# Altium PCB PCB.PcbDoc (part 1 of 2)
Units mm, origin at the board's own origin, x right, y up, seen from the top; angles counter-clockwise.
Board outline 50 x 50 mm, 2 copper layers (Top Layer, Bottom Layer), stack 1.509 mm thick; 202 components, 107 nets, 579 pads, 22 vias.
Unrouted connection lines stored in the file: 421.
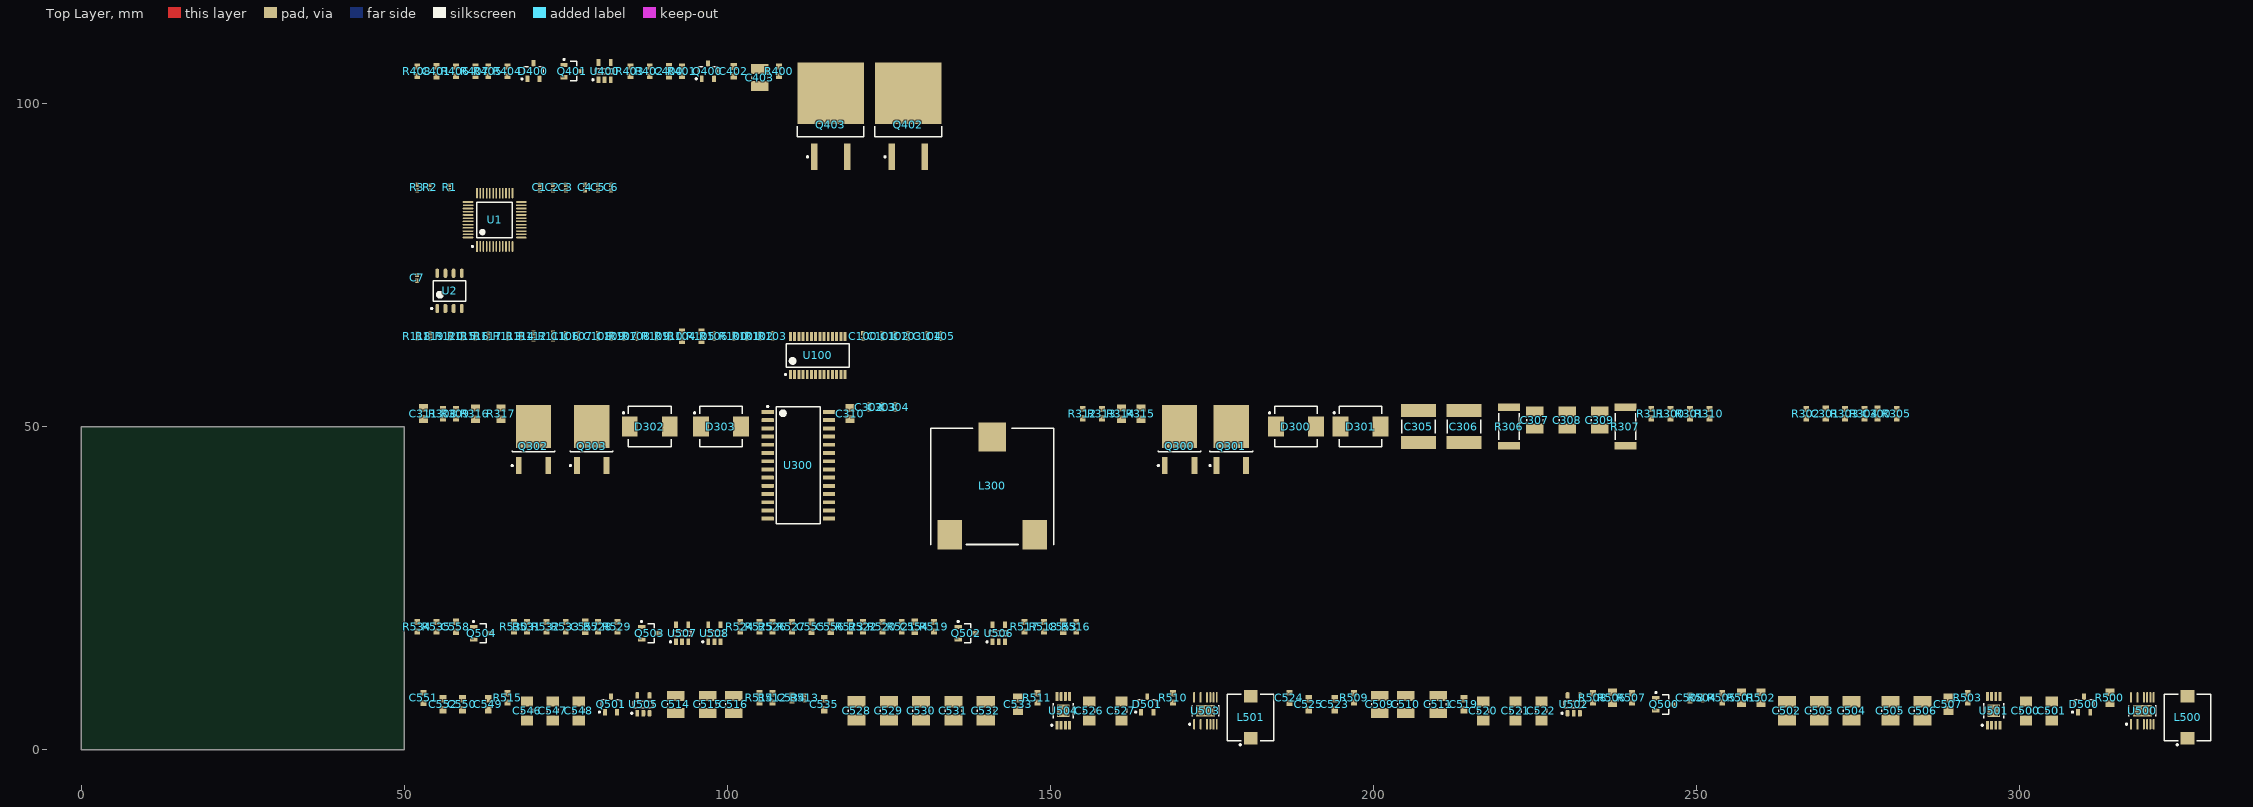
[diagram p0: Top Layer view]
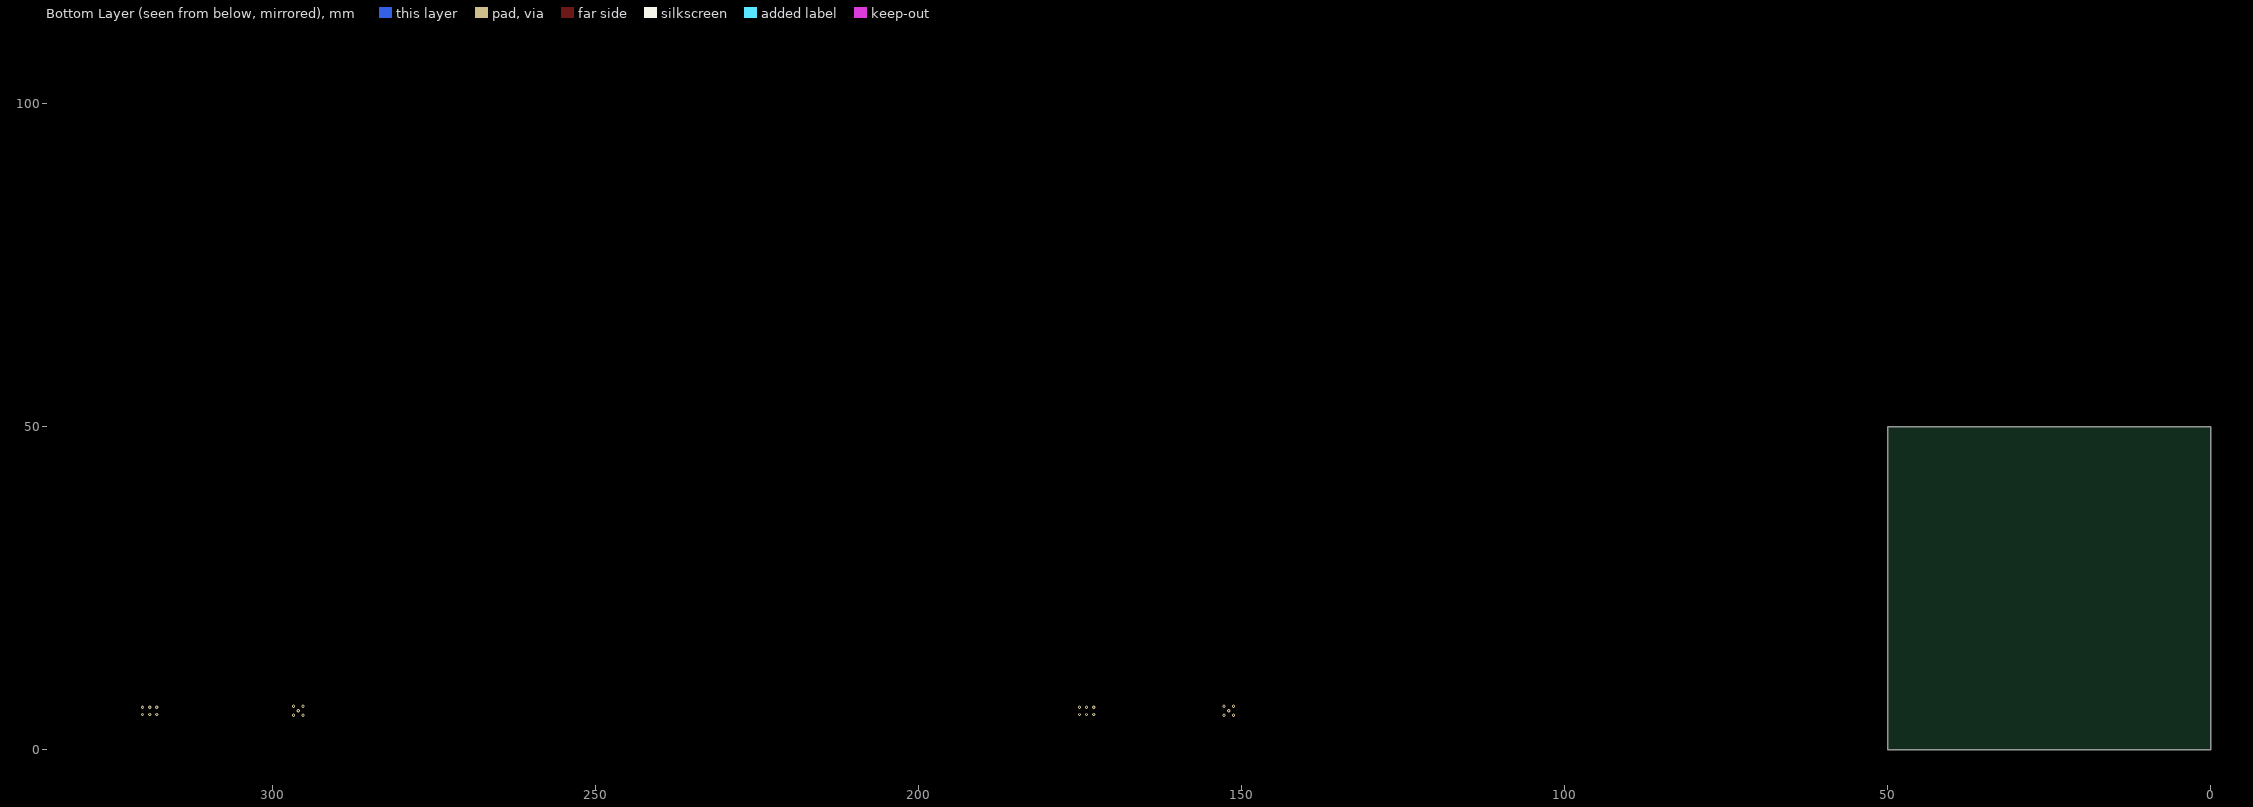
[diagram p1: Bottom Layer view, seen from below]

## Layer stack, top to bottom
Top Solder: solder mask 0.0254, SM-001, Dk 4
Top Layer: signal copper 0.035
Dielectric 1: core 1.4392, Core-043, Dk 4.3
Bottom Layer: signal copper 0.035
Bottom Solder: solder mask 0.0254, SM-001, Dk 4

## Board outline
0,0 0,50 50,50 50,0

## Design rules (kind name [scope] priority, off if disabled: settings)
Clearance [All] p1: gap=0.254 ignorepadtopadclearanceinfootprint=TRUE except(0: Arc-Hole Track-Hole SMDPad-Hole THPad-Hole Via-Hole Fill-Hole Poly-Hole Region-Hole Text-Hole)
DiffPairsRouting [All] p1: maxlimit=0.254 minlimit=0.254 mostfreqgap=0.254 toplayer_minwidth=0.381 toplayer_maxwidth=0.381 toplayer_prefwidth=0.381 bottomlayer_minwidth=0.381 bottomlayer_maxwidth=0.381 bottomlayer_prefwidth=0.381 maxuncoupledlength=12.7
PolygonConnect [All] p1: connectstyle=Relief reliefconductorwidth=0.254 reliefentries=4 polygonreliefangle="90 Angle" airgapwidth=0.254
RoutingTopology [not InNet('GND')] p1: topology=Shortest
RoutingVias [All] p1: holewidth=0.711 width=1.27 viastyle="Through Hole" minholewidth=0.711 minwidth=1.27 maxholewidth=0.711 maxwidth=1.27
SolderMaskExpansion [All] p1: expansion=0.102 istentingtop=FALSE
Width [All] p1: maxlimit=0.254 minlimit=0.254 preferedwidth=0.254
28 further rules are at their usual default settings.

## Classes and differential pairs
component class EEPROM: C7 U2
component class MCU: C1 C2 C3 C4 C5 C6 R1 R2 R3 U1
component class "Panel Mode Switch": C400 C401 C402 C403 D400 Q400 Q401 Q402 Q403 R400 R401 R402 R403 R404 R405 R406 R407 R408 U400
component class "Bridge Regulator": C300 C301 C302 C303 C304 C305 C306 C307 C308 C309 C310 C311 D300 D301 D302 D303 L300 Q300 Q301 Q302 Q303 R300 R301 R302 R303 R304 R305 R306 R307 R308 R309 R310 R311 R312 R313 R314 R315 R316 R317 U300
component class Controller: C100 C101 C102 C103 C104 C105 C106 C107 C108 C109 R100 R101 R102 R103 R104 R105 R106 R107 R108 R109 R110 R111 R112 R113 R114 R115 R116 R117 R118 R119 R120 U100
component class "Bias Regulators 2": C553 C554 C555 C556 C557 C558 Q502 Q503 Q504 R516 R517 R518 R519 R520 R521 R522 R523 R524 R525 R526 R527 R528 R529 R530 R531 R532 R533 R534 R535 U506 U507 U508
component class "Bias Regulators 1": C500 C501 C502 C503 C504 C505 C506 C507 C508 C509 C510 C511 C514 C515 C516 C519 C520 C521 C522 C523 C524 C525 C526 C527 C528 C529 C530 C531 C532 C533 C534 C535 C546 C547 C548 C549 C550 C551 C552 D500 D501 L500 L501 Q500 Q501 R500 R501 R502 R503 R504 R505 R506 R507 R508 R509 R510 R511 R512 R513 R514 R515 U500 U501 U502 U503 U504 U505
differential pair SO: +SO_P -SO_N
differential pair SI: +SI_P -SI_N

## Components (designator, comment, footprint, x,y, rotation, side; value= is the part's Value field where it differs from the comment)
C1 "CL05A475MP5NRNC" "0402_050_5 (Samsumg) B" 71,87 r90 top value=4.7uF
C2 "CL05B104KO5NNNC" "0402_050_5 (Samsumg) B" 73,87 r90 top value=100nF
C3 "CL05B104KO5NNNC" "0402_050_5 (Samsumg) B" 75,87 r90 top value=100nF
C4 "CL05B104KO5NNNC" "0402_050_5 (Samsumg) B" 78,87 r90 top value=100nF
C5 "CL05B104KO5NNNC" "0402_050_5 (Samsumg) B" 80,87 r90 top value=100nF
C6 "CL05A105KA5NQNC" "0402_050_5 (Samsumg) B" 82,87 r90 top value=1uF
C7 "CL05B104KO5NNNC" "0402_050_5 (Samsumg) B" 52,73 r90 top value=100nF
C100 "CL05A105KA5NQNC" "0402_050_5 (Samsumg) B" 121,64 r90 top value=1uF
C101 "CL05A105KA5NQNC" "0402_050_5 (Samsumg) B" 124,64 r90 top value=1uF
C102 "CL05B104KO5NNNC" "0402_050_5 (Samsumg) B" 126,64 r90 top value=100nF
C103 "CL05A105KA5NQNC" "0402_050_5 (Samsumg) B" 128,64 r90 top value=1uF
C104 "CL05A105KA5NQNC" "0402_050_5 (Samsumg) B" 131,64 r90 top value=1uF
C105 "CL05B104KO5NNNC" "0402_050_5 (Samsumg) B" 133,64 r90 top value=100nF
C106 "CL05B104KO5NNNC" "0402_050_5 (Samsumg) B" 75,64 r90 top value=100nF
C107 "CL05B104KO5NNNC" "0402_050_5 (Samsumg) B" 77,64 r90 top value=100nF
C108 "CL05B104KO5NNNC" "0402_050_5 (Samsumg) B" 80,64 r90 top value=100nF
C109 "CL05B104KO5NNNC" "0402_050_5 (Samsumg) B" 82,64 r90 top value=100nF
C300 "0603B103K500NT" 0603_080 278,52 r90 top value=10nF
C301 "0603B103K500NT" 0603_080 270,52 r90 top value=10nF
C302 "CL05B104KO5NNNC" "0402_050_5 (Samsumg) B" 122,53 r90 top value=100nF
C303 "CL05A105KA5NQNC" "0402_050_5 (Samsumg) B" 124,53 r90 top value=1uF
C304 "CL05A105KA5NQNC" "0402_050_5 (Samsumg) B" 126,53 r90 top value=1uF
C305 "FS55X475K101EGG" "2220_F (PSA) B" 207,50 r90 top value=4.7uF
C306 "FS55X475K101EGG" "2220_F (PSA) B" 214,50 r90 top value=4.7uF
C307 "CL32B106KBJNNNE" "1212_250_J (Samsumg) B" 225,51 r90 top value=10uF
C308 "CL32B106KBJNNNE" "1212_250_J (Samsumg) B" 230,51 r90 top value=10uF
C309 "CL32B106KBJNNNE" "1212_250_J (Samsumg) B" 235,51 r90 top value=10uF
C310 "CL21B474KBFNNNE" "0805_125_F (Samsumg) B" 119,52 r90 top value=470nF
C311 "CL21B474KBFNNNE" "0805_125_F (Samsumg) B" 53,52 r90 top value=470nF
C400 "CC0603KRX7R9BB104" 0603#1 91,105 r90 top value=100nF
C401 "CL10C101JB8NNNC" "0603_080_8 (Samsung) B" 55,105 r90 top value=100pF
C402 "CC0603KRX7R9BB104" 0603#1 101,105 r90 top value=100nF
C403 "CL32B105KCJNNNE" "1212_250_J (Samsumg) B" 105,104 r90 top value=1uF
C500 "CL31A106KBHNNNE" "1206_160_H (Samsumg) A" 301,6 r90 top value=10uF
C501 "CL31A106KBHNNNE" "1206_160_H (Samsumg) A" 305,6 r90 top value=10uF
C502 "CL32B105KCJNNNE" "1212_250_J (Samsumg) A" 264,6 r90 top value=1uF
C503 "CL32B105KCJNNNE" "1212_250_J (Samsumg) A" 269,6 r90 top value=1uF
C504 "CL32B105KCJNNNE" "1212_250_J (Samsumg) A" 274,6 r90 top value=1uF
C505 "CL32B105KCJNNNE" "1212_250_J (Samsumg) A" 280,6 r90 top value=1uF
C506 "CL32B105KCJNNNE" "1212_250_J (Samsumg) A" 285,6 r90 top value=1uF
C507 "CL21B103KBANNNC" "0805_065_A (Samsumg) A" 289,7 r90 top value=10nF
C508 "CL05B103KB5NNNC" "0402_050_5 (Samsumg) A" 249,8 r90 top value=10nF
C509 "CL32B225KCJSNNE" "1212_250_J (Samsumg) B" 201,7 r90 top value=2.2uF
C510 "CL32B225KCJSNNE" "1212_250_J (Samsumg) B" 205,7 r90 top value=2.2uF
C511 "CL32B225KCJSNNE" "1212_250_J (Samsumg) B" 210,7 r90 top value=2.2uF
C514 "CL32B225KCJSNNE" "1212_250_J (Samsumg) B" 92,7 r90 top value=2.2uF
C515 "CL32B225KCJSNNE" "1212_250_J (Samsumg) B" 97,7 r90 top value=2.2uF
C516 "CL32B225KCJSNNE" "1212_250_J (Samsumg) B" 101,7 r90 top value=2.2uF
C519 "CL10C100JB8NNNC" "0603_080_8 (Samsung) A" 214,7 r90 top value=10pF
C520 "CL31A106KBHNNNE" "1206_160_H (Samsumg) A" 217,6 r90 top value=10uF
C521 "CL31A106KBHNNNE" "1206_160_H (Samsumg) A" 222,6 r90 top value=10uF
C522 "CL31A106KBHNNNE" "1206_160_H (Samsumg) A" 226,6 r90 top value=10uF
C523 "CL10A225KO8NNNC" "0603_080_8 (Samsung) A" 194,7 r90 top value=2.2uF
C524 "0603B103K500NT" 0603_080 187,8 r90 top value=10nF
C525 "CL10A475KO8NNNC" "0603_080_8 (Samsung) A" 190,7 r90 top value=4.7uF
C526 "CL31A106KBHNNNE" "1206_160_H (Samsumg) A" 156,6 r90 top value=10uF
C527 "CL31A106KBHNNNE" "1206_160_H (Samsumg) A" 161,6 r90 top value=10uF
C528 "CL32B105KCJNNNE" "1212_250_J (Samsumg) A" 120,6 r90 top value=1uF
C529 "CL32B105KCJNNNE" "1212_250_J (Samsumg) A" 125,6 r90 top value=1uF
C530 "CL32B105KCJNNNE" "1212_250_J (Samsumg) A" 130,6 r90 top value=1uF
C531 "CL32B105KCJNNNE" "1212_250_J (Samsumg) A" 135,6 r90 top value=1uF
C532 "CL32B105KCJNNNE" "1212_250_J (Samsumg) A" 140,6 r90 top value=1uF
C533 "CL21B103KBANNNC" "0805_065_A (Samsumg) A" 145,7 r90 top value=10nF
C534 "CL05B103KB5NNNC" "0402_050_5 (Samsumg) A" 110,8 r90 top value=10nF
C535 "CL10C100JB8NNNC" "0603_080_8 (Samsung) A" 115,7 r90 top value=10pF
C546 "CL31A106KBHNNNE" "1206_160_H (Samsumg) A" 69,6 r90 top value=10uF
C547 "CL31A106KBHNNNE" "1206_160_H (Samsumg) A" 73,6 r90 top value=10uF
C548 "CL31A106KBHNNNE" "1206_160_H (Samsumg) A" 77,6 r90 top value=10uF
C549 "CL10A225KO8NNNC" "0603_080_8 (Samsung) A" 63,7 r90 top value=2.2uF
C550 "CL10C101JB8NNNC" "0603_080_8 (Samsung) A" 59,7 r90 top value=100pF
C551 "0603B103K500NT" 0603_080 53,8 r90 top value=10nF
C552 "CL10A475KO8NNNC" "0603_080_8 (Samsung) A" 56,7 r90 top value=4.7uF
C553 "CC0603KRX7R9BB104" 0603#1 152,19 r90 top value=100nF
C554 "CL10B102KB8NNNC" "0603_080_8 (Samsung) B" 129,19 r90 top value=1nF
C555 "CC0603KRX7R9BB104" 0603#1 113,19 r90 top value=100nF
C556 "CC0603KRX7R9BB104" 0603#1 116,19 r90 top value=100nF
C557 "CL10B102KB8NNNC" "0603_080_8 (Samsung) B" 78,19 r90 top value=1nF
C558 "CL10B102KB8NNNC" "0603_080_8 (Samsung) B" 58,19 r90 top value=1nF
D300 "SS510C" "DO-214AB/SMC (MDD) B" 188,50 r0 top
D301 "SS510C" "DO-214AB/SMC (MDD) B" 198,50 r0 top
D302 "SS510C" "DO-214AB/SMC (MDD) B" 88,50 r0 top
D303 "SS510C" "DO-214AB/SMC (MDD) B" 99,50 r0 top
D400 "S-LBAT54CLT1G" "SOT-23-3 (LBAT54C) B" 70,105 r90 top
D500 "S-LBAT54CLT1G" "SOT-23-3 (LBAT54C) B" 310,7 r90 top
D501 "S-LBAT54CLT1G" "SOT-23-3 (LBAT54C) B" 165,7 r90 top
L300 "B82559B0303A019" B82559B0303A019-Footprint-1 141,40 r0 top value=30uH
L500 "SLF7045T-221MR33-PF" "SLF7045 B" 326,5 r90 top value=220uH
L501 "SLF7045T-221MR33-PF" "SLF7045 B" 181,5 r90 top value=220uH
Q300 "DMT8012LK3-13" "TO-252 (DMT8012) B" 170,48 r90 top
Q301 "DMT8012LK3-13" "TO-252 (DMT8012) B" 178,48 r90 top
Q302 "DMT8012LK3-13" "TO-252 (DMT8012) B" 70,48 r90 top
Q303 "DMT8012LK3-13" "TO-252 (DMT8012) B" 79,48 r90 top
Q400 "SS8050" "SOT-23-5 (SS8050) B" 97,105 r90 top
Q401 "BSS123" "SOT-23-3 (2N7002) A" 76,105 r0 top
Q402 "NTB5605PT4G" "D2PAC (NTB5605) B" 128,98 r90 top
Q403 "NTB5605PT4G" "D2PAC (NTB5605) B" 116,98 r90 top
Q500 "2N7002" "SOT-23-3 (2N7002) A" 245,7 r0 top
Q501 "LBSS84LT1G" "SOT-23-3 (LBSS84) B" 82,7 r90 top
Q502 "BSS123" "SOT-23-3 (2N7002) A" 137,18 r0 top
Q503 "2N7002" "SOT-23-3 (2N7002) A" 88,18 r0 top
Q504 "2N7002" "SOT-23-3 (2N7002) A" 62,18 r0 top
R1 "0402WGF2201TCE" "0402 (Uniroyal) C" 57,87 r90 top value=2K2
R2 "0402WGF2201TCE" "0402 (Uniroyal) C" 54,87 r90 top value=2K2
R3 "0402WGF1002TCE" "0402 (Uniroyal) B" 52,87 r90 top value=10K
R100 "Resistor Generic 0402" 0402 101,64 r90 top value=0K0
R101 "0402WGF1202TCE" "0402 (Uniroyal) B" 103,64 r90 top value=12K
R102 "Resistor Generic 0402" 0402 105,64 r90 top value=0K0
R103 "Resistor Generic 0402" 0402 107,64 r90 top value=0K0
R104 "0603WAF6802T5E" 0603#2 93,64 r90 top value=68K
R105 "0603WAF5603T5E" 0603#2 96,64 r90 top value=560K
R106 "0402WGF1002TCE" 0402 98,64 r90 top value=10K
R107 "Resistor Generic 0402" 0402 84,64 r90 top value=0K0
R108 "0402WGF2701TCE" "0402 (Uniroyal) B" 86,64 r90 top value=2K7
R109 "Resistor Generic 0402" 0402 89,64 r90 top value=0K0
R110 "Resistor Generic 0402" 0402 91,64 r90 top value=0K0
R111 "0402WGF3302TCE" "0402 (Uniroyal) A" 73,64 r90 top value=33K
R112 "0402WGF3302TCE" "0402 (Uniroyal) A" 70,64 r90 top value=33K
R113 "0402WGF3901TCE" "0402 (Uniroyal) B" 66,64 r90 top value=3K9
R114 "0402WGF8201TCE" "0402 (Uniroyal) B" 68,64 r90 top value=8K2
R115 "0402WGF1002TCE" "0402 (Uniroyal) B" 59,64 r90 top value=10K
R116 "0402WGF1002TCE" "0402 (Uniroyal) B" 61,64 r90 top value=10K
R117 "0402WGF1002TCE" "0402 (Uniroyal) B" 63,64 r90 top value=10K
R118 "0402WGF1002TCE" "0402 (Uniroyal) B" 52,64 r90 top value=10K
R119 "0402WGF1002TCE" "0402 (Uniroyal) B" 54,64 r90 top value=10K
R120 "0402WGF1002TCE" "0402 (Uniroyal) B" 57,64 r90 top value=10K
R300 "0603WAF8202T5E" "0603 (Uniroyal) B" 246,52 r90 top value=82K
R301 "0603WAF8202T5E" "0603 (Uniroyal) B" 249,52 r90 top value=82K
R302 "0603WAF1001T5E" "0603 (Uniroyal) B" 267,52 r90 top value=1K
R303 "0603WAF1001T5E" "0603 (Uniroyal) B" 273,52 r90 top value=1K
R304 "0603WAF1001T5E" "0603 (Uniroyal) B" 276,52 r90 top value=1K
R305 "0603WAF1001T5E" "0603 (Uniroyal) B" 281,52 r90 top value=1K
R306 "25121WF100MT4E" "2512 (Uniroyal) B" 221,50 r90 top value=10mR
R307 "25121WF100MT4E" "2512 (Uniroyal) B" 239,50 r90 top value=10mR
R308 "0603WAF1002T5E" "0603 (Uniroyal) B" 56,52 r90 top value=10K
R309 "0603WAF1002T5E" "0603 (Uniroyal) B" 58,52 r90 top value=10K
R310 "0603WAF1004T5E" "0603 (Uniroyal) B" 252,52 r90 top value=1M0
R311 "0603WAF1003T5E" "0603 (Uniroyal) B" 243,52 r90 top value=100K
R312 "0603WAF1002T5E" "0603 (Uniroyal) B" 155,52 r90 top value=10K
R313 "0603WAF1002T5E" "0603 (Uniroyal) B" 158,52 r90 top value=10K
R314 "0805W8F0000T5E" "0805 (Uniroyal) B" 161,52 r90 top value=0R0
R315 "0805W8F0000T5E" "0805 (Uniroyal) B" 164,52 r90 top value=0R0
R316 "0805W8F0000T5E" "0805 (Uniroyal) B" 61,52 r90 top value=0R0
R317 "0805W8F0000T5E" "0805 (Uniroyal) B" 65,52 r90 top value=0R0
R400 "0603WAF6803T5E" "0603 (Uniroyal) B" 108,105 r90 top value=680K
R401 "0603WAF3302T5E" "0603 (Uniroyal) B" 93,105 r90 top value=33K
R402 "0603WAF6802T5E" "0603 (Uniroyal) B" 88,105 r90 top value=68K
R403 "0603WAF1005T5E" "0603 (Uniroyal) B" 85,105 r90 top value=10M
R404 "0603WAF5600T5E" "0603 (Uniroyal) B" 66,105 r90 top value=560R
R405 "0603WAF6801T5E" "0603 (Uniroyal) B" 63,105 r90 top value=6K8
R406 "0603WAF6802T5E" "0603 (Uniroyal) B" 58,105 r90 top value=68K
R407 "0603WAF1005T5E" "0603 (Uniroyal) B" 61,105 r90 top value=10M
R408 "0603WAF1004T5E" "0603 (Uniroyal) B" 52,105 r90 top value=1M0
R500 "0805W8F1004T5E" "0805 (Uniroyal) B" 314,8 r90 top value=1M0
R501 "0805W8F3903T5E" "0805 (Uniroyal) B" 257,8 r90 top value=390K
R502 "0805W8F6803T5E" "0805 (Uniroyal) B" 260,8 r90 top value=680K
R503 "0603WAF1204T5E" "0603 (Uniroyal) B" 292,8 r90 top value=1M2
R504 "0402WGF1003TCE" "0402 (Uniroyal) B" 251,8 r90 top value=100K
R505 "0603WAF3302T5E" "0603 (Uniroyal) B" 254,8 r90 top value=33K
R506 "0805W8F1502T5E" "0805 (Uniroyal) B" 237,8 r90 top value=15K
R507 "0603WAF1503T5E" "0603 (Uniroyal) B" 240,8 r90 top value=150K
R508 "0603WAF3903T5E" 0603#2 234,8 r90 top value=390K
R509 "0603WAF1003T5E" "0603 (Uniroyal) B" 197,8 r90 top value=100K
R510 "0603WAF6803T5E" "0603 (Uniroyal) B" 169,8 r90 top value=680K
R511 "0603WAF3903T5E" "0603 (Uniroyal) B" 148,8 r90 top value=390K
R512 "0603WAF1002T5E" "0603 (Uniroyal) B" 107,8 r90 top value=10K
R513 "0402WGF1003TCE" "0402 (Uniroyal) B" 112,8 r90 top value=100K
R514 "0603WAF1203T5E" "0603 (Uniroyal) B" 105,8 r90 top value=120K
R515 "0603WAF1003T5E" "0603 (Uniroyal) B" 66,8 r90 top value=100K
R516 "0603WAF1005T5E" "0603 (Uniroyal) B" 154,19 r90 top value=10M
R517 "0603WAF1005T5E" "0603 (Uniroyal) B" 146,19 r90 top value=10M
R518 "0603WAF6804T5E" "0603 (Uniroyal) B" 149,19 r90 top value=6M8
R519 "0603WAF4700T5E" "0603 (Uniroyal) B" 132,19 r90 top value=470R
R520 "0603WAF1005T5E" "0603 (Uniroyal) B" 124,19 r90 top value=10M
R521 "0603WAF2704T5E" "0603 (Uniroyal) B" 127,19 r90 top value=2M7
R522 "HMC0603JT33M0" "0603 (Stackpole HMC) B" 121,19 r90 top value=33M
R523 "0603WAF1004T5E" "0603 (Uniroyal) B" 119,19 r90 top value=1M0
R524 "0603WAF1005T5E" "0603 (Uniroyal) B" 102,19 r90 top value=10M
R525 "0603WAF2204T5E" "0603 (Uniroyal) B" 105,19 r90 top value=2M2
R526 "0603WAF1005T5E" "0603 (Uniroyal) B" 107,19 r90 top value=10M
R527 "0603WAF3303T5E" "0603 (Uniroyal) B" 110,19 r90 top value=330K
R528 "0603WAF4700T5E" "0603 (Uniroyal) B" 80,19 r90 top value=470R
R529 "0603WAF1004T5E" "0603 (Uniroyal) B" 83,19 r90 top value=1M0
R530 "0603WAF1005T5E" "0603 (Uniroyal) B" 67,19 r90 top value=10M
R531 "0603WAF2704T5E" "0603 (Uniroyal) B" 69,19 r90 top value=2M7
R532 "0603WAF1005T5E" "0603 (Uniroyal) B" 72,19 r90 top value=10M
R533 "0603WAF3303T5E" "0603 (Uniroyal) B" 75,19 r90 top value=330K
R534 "0603WAF1005T5E" "0603 (Uniroyal) B" 52,19 r90 top value=10M
R535 "0603WAF6804T5E" "0603 (Uniroyal) B" 55,19 r90 top value=6M8
U1 "STM32L072CBT6" FP-LQFP48-5B-IPC_B 64,82 r90 top
U2 "M24C64-RMN6TP" "SO8N (M24) B" 57,71 r90 top
U100 "SM72445MT/NOPB" PW0028A_N 114,61 r90 top
U300 "SM72295MAX/NOPB" DW0028A_N 111,44 r0 top
U400 "MCP6541T-I/OT" "SOT-23-5 (MCP75x) B" 81,105 r90 top
U500 "LTC3639HMSE#PBF" LT-MSE-16-V(12)4PR-EDP_N 319,6 r90 top
U501 "TPS7A4001" DGN0008B_N 296,6 r90 top
U502 "LP2985A-50DBVR" "SOT-23-5 (DBV0005A) B" 231,7 r90 top
U503 "LTC3639HMSE#PBF" LT-MSE-16-V(12)4PR-EDP_N 174,6 r90 top
U504 "TPS7A4001" DGN0008B_N 152,6 r90 top
U505 "LP2985A-33DBVR" "SOT-23-5 (DBV0005A) B" 87,7 r90 top
U506 "MCP6541T-I/OT" "SOT-23-5 (MCP75x) B" 142,18 r90 top
U507 "MCP6541T-I/OT" "SOT-23-5 (MCP75x) B" 93,18 r90 top
U508 "MCP6541T-I/OT" "SOT-23-5 (MCP75x) B" 98,18 r90 top

## Footprints (in the part's own frame and the unit in brackets; to place one, negate y for a bottom-side part, rotate by r counter-clockwise, add the part's x,y. Pads: shape width x height; smd on the part's side, far side on the other; paste and mask are expansions set on the pad)
0402 [mm] "Chip Resistor, 2-Leads, Body 1,00x0,50mm, IPC Medium Density"
  rect 0.55x0.55 smd: 1(-0.475,0) 2(0.475,0)
  body extent -0.55,-0.28 0.55,0.28, height 0.4
"0402 (Uniroyal) A" [mm] "Chip Resistor, 2-Leads, Body 1.00x0.50mm, IPC Low Density"
  rect 0.75x0.65 smd: 1(-0.475,0) 2(0.475,0)
  body extent -0.55,-0.28 0.55,0.28, height 0.4
"0402 (Uniroyal) B" [mm] "Chip Resistor, 2-Leads, Body 1.00x0.50mm, IPC Medium Density"
  rect 0.65x0.55 smd: 1(-0.425,0) 2(0.425,0)
  body extent -0.55,-0.28 0.55,0.28, height 0.4
"0402 (Uniroyal) C" [mm] "Chip Resistor, 2-Leads, Body 1.00x0.50mm, IPC High Density"
  rect 0.55x0.45 smd: 1(-0.375,0) 2(0.375,0)
  body extent -0.55,-0.28 0.55,0.28, height 0.4
"0402_050_5 (Samsumg) A" [mm] "Chip Capacitor, 2-Leads, Body 1.00x0.50mm, IPC Low Density"
  rect 0.76x0.72 smd: 1(-0.49,0) 2(0.49,0)
  body extent -0.53,-0.28 0.53,0.28, height 0.55
"0402_050_5 (Samsumg) B" [mm] "Chip Capacitor, 2-Leads, Body 1.00x0.50mm, IPC Medium Density"
  rect 0.66x0.62 smd: 1(-0.44,0) 2(0.44,0)
  body extent -0.53,-0.28 0.53,0.28, height 0.55
0603#1 [mm] "Chip Capacitor, 2-Leads, Body 1,60x0,80mm, IPC Medium Density"
  rect 1.05x0.95 smd: 1(-0.725,0) 2(0.725,0)
  body extent -0.85,-0.45 0.85,0.45, height 0.9
0603#2 [mm] "Chip Resistor, 2-Leads, Body 1,60x0,80mm, IPC Medium Density"
  rect 0.95x0.9 smd: 1(-0.725,0) 2(0.725,0)
  body extent -0.85,-0.45 0.85,0.45, height 0.55
"0603 (Stackpole HMC) B" [mm] "Chip Resistor, 2-Leads, Body 1.60x0.80mm, IPC Medium Density"
  rect 0.95x0.9 smd: 1(-0.725,0) 2(0.725,0)
  body extent -0.85,-0.45 0.85,0.45, height 0.55
"0603 (Uniroyal) B" [mm] "Chip Resistor, 2-Leads, Body 1.60x0.80mm, IPC Medium Density"
  rect 0.95x0.9 smd: 1(-0.725,0) 2(0.725,0)
  body extent -0.85,-0.45 0.85,0.45, height 0.55
0603_080 [mm] "Chip Capacitor, 2-Leads, Body 1,60x0,80mm, IPC Medium Density"
  rect 0.9x0.95 smd: 1(-0.8,0) 2(0.8,0)
  body extent -0.85,-0.45 0.85,0.45, height 0.9
"0603_080_8 (Samsung) A" [mm] "Chip Capacitor, 2-Leads, Body 1.60x0.80mm, IPC Low Density"
  rect 1.2x1.05 smd: 1(-0.85,0) 2(0.85,0)
  body extent -0.85,-0.45 0.85,0.45, height 0.9
"0603_080_8 (Samsung) B" [mm] "Chip Capacitor, 2-Leads, Body 1.60x0.80mm, IPC Medium Density"
  rect 1x0.95 smd: 1(-0.75,0) 2(0.75,0)
  body extent -0.85,-0.45 0.85,0.45, height 0.9
"0805 (Uniroyal) B" [mm] "Chip Resistor, 2-Leads, Body 2.00x1.27mm, IPC Medium Density"
  rect 1.1x1.4 smd: 1(-0.875,0) 2(0.875,0)
  body extent -1.07,-0.7 1.07,0.7, height 0.65
"0805_065_A (Samsumg) A" [mm] "Chip Capacitor, 2-Leads, Body 2.00x1.25mm, IPC Low Density"
  rect 1.4x1.5 smd: 1(-0.95,0) 2(0.95,0)
  body extent -1.05,-0.67 1.05,0.67, height 0.75
"0805_125_F (Samsumg) B" [mm] "Chip Capacitor, 2-Leads, Body 2.00x1.25mm, IPC Medium Density"
  rect 1.2x1.4 smd: 1(-0.85,0) 2(0.85,0)
  body extent -1.05,-0.67 1.05,0.67, height 1.35
"1206_160_H (Samsumg) A" [mm] "Chip Capacitor, 2-Leads, Body 3.20x1.60mm, IPC Low Density"
  rect 1.55x1.9 smd: 1(-1.475,0) 2(1.475,0)
  silkscreen extent -0.3,-0.85 0.3,0.85, body extent -1.7,-0.9 1.7,0.9, height 1.8
"1212_250_J (Samsumg) A" [mm] "Chip Capacitor, 2-Leads, Body 3.20x2.50mm, IPC Low Density"
  rect 1.75x2.8 smd: 1(-1.425,0) 2(1.425,0)
  silkscreen extent -0.15,-1.3 0.15,1.3, body extent -1.75,-1.35 1.75,1.35, height 2.7
"1212_250_J (Samsumg) B" [mm] "Chip Capacitor, 2-Leads, Body 3.20x2.50mm, IPC Medium Density"
  rect 1.55x2.7 smd: 1(-1.325,0) 2(1.325,0)
  silkscreen extent -0.15,-1.25 0.15,1.25, body extent -1.75,-1.35 1.75,1.35, height 2.7
"2220_F (PSA) B" [mm] "Chip Capacitor, 2-Leads, Body 5.75x5.00mm, IPC Medium Density"
  rect 2x5.4 smd: 1(-2.45,0) 2(2.45,0)
  silkscreen extent -1.05,-2.6 1.05,2.6, body extent -3.1,-2.7 3.1,2.7, height 2.2
"2512 (Uniroyal) B" [mm] "Chip Resistor, 2-Leads, Body 6.35x3.20mm, IPC Medium Density"
  rect 1.15x3.4 smd: 1(-3,0) 2(3,0)
  silkscreen extent -2.05,-1.6 2.05,1.6, body extent -3.22,-1.7 3.22,1.7, height 0.65
B82559B0303A019-Footprint-1 [mm]
  rect 3.85x4.5 smd: 1(-6.575,-6.75) 2(6.575,-6.75)
  rect 4.3x4.5 smd: 3(0,8.35)
  silkscreen extent -9.5,-8.25 9.5,9.75, body extent -9.3,-8.2 9.8,9.8, height 10.2
"D2PAC (NTB5605) B" [mm] "D2-PAK, 3-Pads, Body 7.93x8.50mm (max), IPC Medium Density"
  rect 4.15x1 smd: 1(-6.25,2.54) 3(-6.25,-2.54)
  rect 9.5x10.35 smd: 4(3.6,0)
  silkscreen extent -6.37,-5.15 -1.55,5.15, body extent -7.17,-5.15 8.07,5.15, height 4.83
DGN0008B_N [mm] "TSOP, 8-Leads, Body 3.1x3.1mm, Pitch 0.65mm, Thermal Pad 1.98x1.88mm, IPC Medium Density"
  rrect22% 1.35x0.45 smd: 1(-2.225,0.975) 2(-2.225,0.325) 3(-2.225,-0.325) 4(-2.225,-0.975) 5(2.225,-0.975) 6(2.225,-0.325) 7(2.225,0.325) 8(2.225,0.975)
  rrect5% 1.88x1.98 smd: 9(0,0)
  silkscreen extent -2.35,-1.55 1.15,1.9, body extent -2.45,-1.5 2.45,1.5, height 0.94
"DO-214AB/SMC (MDD) B" [mm] "Molded Diode, 2-Leads, Body 6.86x5.91mm, IPC Medium Density"
  rect 2.45x3.15 smd: 1(-3.1,0) 2(3.1,0)
  silkscreen extent -4.2,-3.15 3.3,3.15, body extent -3.52,-3.11 3.52,3.11, height 2.62
DW0028A_N [mm] "SOIC, 28-Leads, Body 18.1x7.6mm, Pitch 1.27mm, IPC Medium Density"
  rrect17% 1.9x0.6 smd: 1(-4.75,8.255) 2(-4.75,6.985) 3(-4.75,5.715) 4(-4.75,4.445) 5(-4.75,3.175) 6(-4.75,1.905) 7(-4.75,0.635) 8(-4.75,-0.635) 9(-4.75,-1.905) 10(-4.75,-3.175) 11(-4.75,-4.445) 12(-4.75,-5.715) 13(-4.75,-6.985) 14(-4.75,-8.255) 15(4.75,-8.255) 16(4.75,-6.985) 17(4.75,-5.715) 18(4.75,-4.445) 19(4.75,-3.175) 20(4.75,-1.905) 21(4.75,-0.635) 22(4.75,0.635) 23(4.75,1.905) 24(4.75,3.175) 25(4.75,4.445) 26(4.75,5.715) 27(4.75,6.985) 28(4.75,8.255)
  silkscreen extent -4.87,-9.05 3.4,9.23, body extent -5.16,-8.95 5.16,8.95, height 2.55
FP-LQFP48-5B-IPC_B [mm]
  rect 1.655x0.252 smd paste+0 mask+0: 1(-4.125,2.75)
  rrect100% 1.655x0.252 smd paste+0 mask+0: 2(-4.125,2.25) 3(-4.125,1.75) 4(-4.125,1.25) 5(-4.125,0.75) 6(-4.125,0.25) 7(-4.125,-0.25) 8(-4.125,-0.75) 9(-4.125,-1.25) 10(-4.125,-1.75) 11(-4.125,-2.25) 12(-4.125,-2.75) 25(4.125,-2.75) 26(4.125,-2.25) 27(4.125,-1.75) 28(4.125,-1.25) 29(4.125,-0.75) 30(4.125,-0.25) 31(4.125,0.25) 32(4.125,0.75) 33(4.125,1.25) 34(4.125,1.75) 35(4.125,2.25) 36(4.125,2.75)
  rrect100% 0.252x1.655 smd paste+0 mask+0: 13(-2.75,-4.125) 14(-2.25,-4.125) 15(-1.75,-4.125) 16(-1.25,-4.125) 17(-0.75,-4.125) 18(-0.25,-4.125) 19(0.25,-4.125) 20(0.75,-4.125) 21(1.25,-4.125) 22(1.75,-4.125) 23(2.25,-4.125) 24(2.75,-4.125) 37(2.75,4.125) 38(2.25,4.125) 39(1.75,4.125) 40(1.25,4.125) 41(0.75,4.125) 42(0.25,4.125) 43(-0.25,4.125) 44(-0.75,4.125) 45(-1.25,4.125) 46(-1.75,4.125) 47(-2.25,4.125) 48(-2.75,4.125)
  silkscreen extent -4.25,-2.75 2.75,3.58, body extent -5.2,-5.2 5.2,5.2, height 0.25
LT-MSE-16-V(12)4PR-EDP_N [mm] "SOP, 12-Leads, Body 4.1x3.1mm, Pitch 0.5mm, Thermal Pad 1.76x2.95mm, IPC Medium Density"
  oval 1.65x0.3 smd: 1(-2.075,1.75) 3(-2.075,0.75) 5(-2.075,-0.25) 6(-2.075,-0.75) 7(-2.075,-1.25) 8(-2.075,-1.75) 9(2.075,-1.75) 10(2.075,-1.25) 11(2.075,-0.75) 12(2.075,-0.25) 14(2.075,0.75) 16(2.075,1.75)
  rect 1.76x2.95 smd: 17(0,0)
  silkscreen extent -2.2,-2.08 0.85,2.57, body extent -2.45,-2.05 2.45,2.05, height 1.1
PW0028A_N [mm] "SOP, 28-Leads, Body 9.8x4.5mm, Pitch 0.65mm, IPC Medium Density"
  rrect22% 1.4x0.45 smd: 1(-2.95,4.225) 2(-2.95,3.575) 3(-2.95,2.925) 4(-2.95,2.275) 5(-2.95,1.625) 6(-2.95,0.975) 7(-2.95,0.325) 8(-2.95,-0.325) 9(-2.95,-0.975) 10(-2.95,-1.625) 11(-2.95,-2.275) 12(-2.95,-2.925) 13(-2.95,-3.575) 14(-2.95,-4.225) 15(2.95,-4.225) 16(2.95,-3.575) 17(2.95,-2.925) 18(2.95,-2.275) 19(2.95,-1.625) 20(2.95,-0.975) 21(2.95,-0.325) 22(2.95,0.325) 23(2.95,0.975) 24(2.95,1.625) 25(2.95,2.275) 26(2.95,2.925) 27(2.95,3.575) 28(2.95,4.225)
  silkscreen extent -3.07,-4.9 1.85,5.12, body extent -3.21,-4.85 3.21,4.85, height 1
"SLF7045 B" [mm] "Precision Wire Wound Inductor, 2-Leads, Body 7.00x7.00mm, IPC Medium Density"
  rect 1.9x2.1 smd: 1(-3.25,0) 2(3.25,0)
  silkscreen extent -4.37,-3.6 3.6,3.6, body extent -3.6,-3.5 3.6,3.5, height 4.9
"SO8N (M24) B" [mm] "SOIC, 8-Leads, Body 4.90x3.90mm, Pitch 1.27mm, IPC Medium Density"
  oval 1.45x0.6 smd: 1(-2.725,1.905) 2(-2.725,0.635) 3(-2.725,-0.635) 4(-2.725,-1.905) 5(2.725,-1.905) 6(2.725,-0.635) 7(2.725,0.635) 8(2.725,1.905)
  silkscreen extent -2.85,-2.5 1.6,2.88, body extent -3,-2.5 3,2.5, height 1.75
"SOT-23-3 (2N7002) A" [mm] "SOT23, 3-Leads, Body 2.90x2.40mm, Pitch 0.95mm, IPC Low Density"
  rect 1.15x0.65 smd: 1(-1.275,0.95) 2(-1.275,-0.95) 3(1.275,0)
  silkscreen extent -1.4,-1.5 0.7,1.95, body extent -1.28,-1.5 1.28,1.5, height 1.15
"SOT-23-3 (LBAT54C) B" [mm] "SOT23, 3-Leads, Body 2.92x2.37mm, Pitch 0.95mm, IPC Medium Density"
  rect 1x0.6 smd: 1(-1.2,0.95) 2(-1.2,-0.95) 3(1.2,0)
  silkscreen extent -1.32,-1.5 0.7,1.92, body extent -1.42,-1.52 1.42,1.52, height 1.11
"SOT-23-3 (LBSS84) B" [mm] "SOT23, 3-Leads, Body 2.92x2.37mm, Pitch 0.95mm, IPC Medium Density"
  rect 1x0.6 smd: 1(-1.2,0.95) 2(-1.2,-0.95) 3(1.2,0)
  silkscreen extent -1.32,-1.5 0.7,1.92, body extent -1.32,-1.52 1.32,1.52, height 1.11
"SOT-23-5 (DBV0005A) B" [mm] "SOT23, 5-Leads, Body 2.90x2.80mm, Pitch 0.95mm, IPC Medium Density"
  rrect50% 1x0.6 smd: 1(-1.375,0.95) 2(-1.375,0) 3(-1.375,-0.95) 4(1.375,-0.95) 5(1.375,0.95)
  silkscreen extent -1.5,-1.55 0.5,1.92, body extent -1.5,-1.53 1.5,1.53, height 1.45
"SOT-23-5 (MCP75x) B" [mm] "SOT23, 5-Leads, Body 2.90x2.80mm, Pitch 0.95mm, IPC Medium Density"
  rect 1.05x0.6 smd: 1(-1.325,0.95) 2(-1.325,0) 3(-1.325,-0.95) 4(1.325,-0.95) 5(1.325,0.95)
  silkscreen extent -1.45,-1.45 0.4,1.92, body extent -1.4,-1.45 1.4,1.45, height 1.45
"SOT-23-5 (SS8050) B" [mm] "SOT23, 3-Leads, Body 2.90x2.40mm, Pitch 0.95mm, IPC Medium Density"
  rect 0.95x0.6 smd: 1(-1.175,0.95) 2(-1.175,-0.95) 3(1.175,0)
  silkscreen extent -1.3,-1.5 0.7,1.92, body extent -1.28,-1.5 1.28,1.5, height 1.15
"TO-252 (DMT8012) B" [mm]
  rect 2.6x0.9 smd: 1(-4.05,2.29) 3(-4.05,-2.29)
  rect 6.7x5.45 smd: 4(2,0)
  silkscreen extent -4.17,-3.3 -1.75,3.41, body extent -4.24,-3.3 5.42,3.3, height 2.39

## Part data
C1: library part CMP-045-000019-8, "MLCC 4.7uF 0402 10V X5R ±20%", Dielectric=X5R, LCSC Part Number=C23733, Manufacturer=Samsung, Package=0402, Tolerance=±20%, Voltage=10V, ComponentLink1Description=Datasheet, ComponentLink1URL=https://datasheet.lcsc.com/szlcsc/Samsung-Electro-Mechanics-CL05C100JB5NNNC_C32949.pdf, Populate=CRITICAL
C2 C3 C4 C5 C7 C102 C105 C106 C107 C108 C109 C302: library part CMP-045-000014-12, "MLCC 100nF 0402 16V X7R ±10%", Dielectric=X7R, LCSC Part Number=C1525, Manufacturer=Samsung, Package=0402, Tolerance=±10%, Voltage=16V, ComponentLink1Description=Datasheet, ComponentLink1URL=https://datasheet.lcsc.com/szlcsc/Samsung-Electro-Mechanics-CL05C100JB5NNNC_C32949.pdf, Populate=CRITICAL
C6 C100 C101 C103 C104 C303 C304: library part CMP-045-000001-7, "MLCC 1uF 0402 25V X5R ±10%", Dielectric=X5R, LCSC Part Number=C52923, Manufacturer=Samsung, Package=0402, Tolerance=±10%, Voltage=25V, ComponentLink1Description=Datasheet, ComponentLink1URL=https://datasheet.lcsc.com/szlcsc/Samsung-Electro-Mechanics-CL05C100JB5NNNC_C32949.pdf, Populate=CRITICAL
C300 C301: library part CMP-014-000000-8, "MLCC 10nF 0603 50V X7R ±10%", Dielectric=X7R, LCSC Part Number=C57112, Manufacturer=Guandong, Package=0603, Tolerance=±15%, Voltage=50V, ComponentLink1Description=Datasheet, ComponentLink1URL=https://datasheet.lcsc.com/szlcsc/Guangdong-Fenghua-Advanced-Tech-0402B102K500NT_C1523.pdf, Populate=CRITICAL
C305 C306: library part CMP-014-000011-1, "MLCC 4.7uF 2220 100V X7R ±10%", Dielectric=X7R, LCSC Part Number=C153031, Manufacturer="Prosperity Dielectrics", Package=2210, Tolerance=±10%, Voltage=100V, ComponentLink1Description=Datasheet, ComponentLink1URL=https://datasheet.lcsc.com/lcsc/1811111621_PSA-Prosperity-Dielectrics-FS55X475K101EGG_C153031.pdf, Populate=CRITICAL
C307 C308 C309: library part CMP-014-000012-1, "MLCC 10uF 1210 50V X7R ±10%", Dielectric=X7R, LCSC Part Number=C138687, Manufacturer=Samsung, Package=1210, Tolerance=±10%, Voltage=50V, ComponentLink1Description=Datasheet, ComponentLink1URL=https://datasheet.lcsc.com/szlcsc/Samsung-Electro-Mechanics-CL05C100JB5NNNC_C32949.pdf, Populate=CRITICAL
C310 C311: library part CMP-014-000014-1, "MLCC 470nF 0805 50V X7R ±10%", Dielectric=X7R, LCSC Part Number=C13967, Manufacturer=Samsung, Package=0805, Tolerance=±10%, Voltage=50V, ComponentLink1Description=Datasheet, ComponentLink1URL=https://datasheet.lcsc.com/szlcsc/Samsung-Electro-Mechanics-CL05C100JB5NNNC_C32949.pdf, Populate=CRITICAL
C400 C402 C553 C555 C556: library part CMP-047-000000-6, "MLCC 100nF 50V 0603 X7R ±10%", Dielectric=X7R, LCSC Part Number=C14663, Manufacturer=Yageo, Package=0603, Tolerance=±10%, Voltage=50V, ComponentLink1Description=Datasheet, ComponentLink1URL=https://datasheet.lcsc.com/szlcsc/YAGEO-CC0603KRX7R9BB104_C14663.pdf, Populate=CRITICAL
C401 C550: library part CMP-045-000015-8, "MLCC 100pF 0603 50V C0G ±0.1pF", Dielectric=C0G, LCSC Part Number=C14858, Manufacturer=Samsung, Package=0603, Tolerance=±0.1pF, Voltage=50V, ComponentLink1Description=Datasheet, ComponentLink1URL=https://datasheet.lcsc.com/szlcsc/Samsung-Electro-Mechanics-CL05C100JB5NNNC_C32949.pdf, Populate=CRITICAL
C403 C502 C503 C504 C505 C506 C528 C529 C530 C531 C532: library part CMP-014-000009-3, "MLCC 1uF 1210 100V X7R ±10%", Dielectric=X7R, LCSC Part Number=C444847, Manufacturer=Samsung, Package=1210, Tolerance=±10%, Voltage=100V, ComponentLink1Description=Datasheet, ComponentLink1URL=https://datasheet.lcsc.com/szlcsc/Samsung-Electro-Mechanics-CL05C100JB5NNNC_C32949.pdf, Populate=CRITICAL
C500 C501 C520 C521 C522 C526 C527 C546 C547 C548: library part CMP-045-000010-7, "MLCC 10uF 1206 50V X5R ±10%", Dielectric=X5R, LCSC Part Number=C13585, Manufacturer=Samsung, Package=1206, Tolerance=±10%, Voltage=50V, ComponentLink1Description=Datasheet, ComponentLink1URL=https://datasheet.lcsc.com/szlcsc/Samsung-Electro-Mechanics-CL05C100JB5NNNC_C32949.pdf, Populate=CRITICAL
C507 C533: library part CMP-045-000006-9, "MLCC 10nF 0805 50V X7R ±10%", Dielectric=X7R, LCSC Part Number=C1710, Manufacturer=Samsung, Package=0805, Tolerance=±10%, Voltage=50V, ComponentLink1Description=Datasheet, ComponentLink1URL=https://datasheet.lcsc.com/szlcsc/Samsung-Electro-Mechanics-CL05C100JB5NNNC_C32949.pdf, Populate=CRITICAL
C508 C534: library part CMP-045-000005-9, "MLCC 10nF 0402 50V X7R ±10%", Dielectric=X7R, LCSC Part Number=C15195, Manufacturer=Samsung, Package=0402, Tolerance=±10%, Voltage=50V, ComponentLink1Description=Datasheet, ComponentLink1URL=https://datasheet.lcsc.com/szlcsc/Samsung-Electro-Mechanics-CL05C100JB5NNNC_C32949.pdf, Populate=CRITICAL
C509 C510 C511 C514 C515 C516: library part CMP-014-000010-1, "MLCC 2.2uF 1210 100V X7R ±10%", Dielectric=X7R, LCSC Part Number=C55151, Manufacturer=Samsung, Package=1210, Tolerance=±10%, Voltage=100V, ComponentLink1Description=Datasheet, ComponentLink1URL=https://datasheet.lcsc.com/szlcsc/Samsung-Electro-Mechanics-CL05C100JB5NNNC_C32949.pdf, Populate=CRITICAL
C519 C535: library part CMP-045-000007-7, "MLCC 10pF 0603 C0G ±0.1pF", Dielectric=C0G, LCSC Part Number=C1634, Manufacturer=Samsung, Package=0603, Tolerance=±0.1pF, Voltage=50V, ComponentLink1Description=Datasheet, ComponentLink1URL=https://datasheet.lcsc.com/szlcsc/Samsung-Electro-Mechanics-CL05C100JB5NNNC_C32949.pdf, Populate=CRITICAL
C523 C549: library part CMP-045-000016-8, "MLCC 2.2uF 0603 16V X5R ±10%", Dielectric=X5R, LCSC Part Number=C23630, Manufacturer=Samsung, Package=0603, Tolerance=±10%, Voltage=16V, ComponentLink1Description=Datasheet, ComponentLink1URL=https://datasheet.lcsc.com/szlcsc/Samsung-Electro-Mechanics-CL05C100JB5NNNC_C32949.pdf, Populate=CRITICAL
C524 C551: library part CMP-014-000000-7, "MLCC 10nF 0603 50V X7R ±10%", Dielectric=X7R, LCSC Part Number=C57112, Manufacturer=Guandong, Package=0603, Tolerance=±15%, Voltage=50V, ComponentLink1Description=Datasheet, ComponentLink1URL=https://datasheet.lcsc.com/szlcsc/Guangdong-Fenghua-Advanced-Tech-0402B102K500NT_C1523.pdf, Populate=CRITICAL
C525 C552: library part CMP-014-000007-5, "MLCC 4.7uF 0603 16V X5R ±10%", Dielectric=X5R, LCSC Part Number=C19666, Manufacturer=Samsung, Package=0603, Tolerance=±10%, Voltage=16V, ComponentLink1Description=Datasheet, ComponentLink1URL=https://datasheet.lcsc.com/szlcsc/Samsung-Electro-Mechanics-CL05C100JB5NNNC_C32949.pdf, Populate=CRITICAL
C554 C557 C558: library part CMP-045-000000-8, "MLCC 1nF 0603 50V X7R ±10%", Dielectric=X7R, LCSC Part Number=C1588, Manufacturer=Samsung, Package=0603, Tolerance=±10%, Voltage=50V, ComponentLink1Description=Datasheet, ComponentLink1URL=https://datasheet.lcsc.com/szlcsc/Samsung-Electro-Mechanics-CL05C100JB5NNNC_C32949.pdf, Populate=CRITICAL